# Altium PCB DB_1.PcbDoc
Units mil, origin at the board's own origin, x right, y up, seen from the top; angles counter-clockwise.
Board outline 2250 x 3000 mil, 4 copper layers (Top Layer, Signal Layer 1, Ground, Bottom Layer), stack 30.634 mil thick; 60 components, 61 nets, 348 pads, 107 vias.
Unrouted connection lines stored in the file: 50.
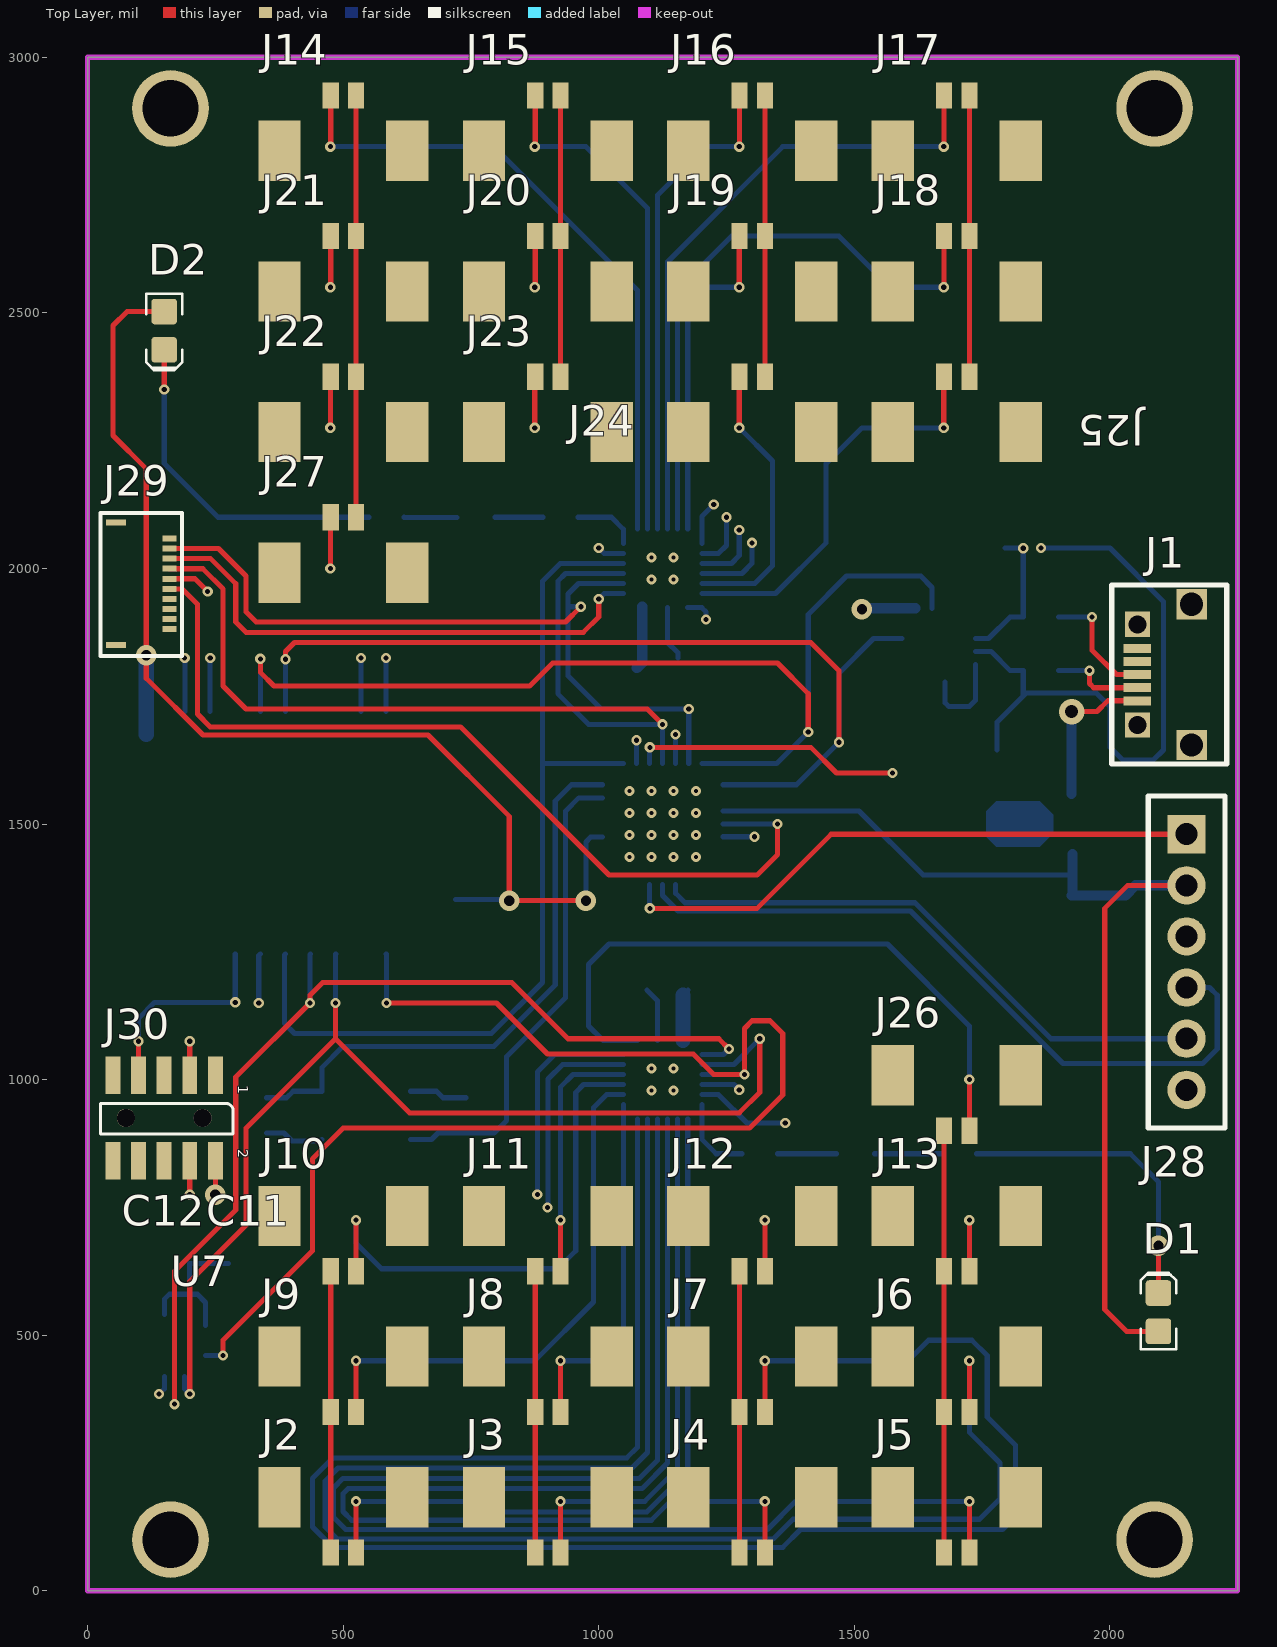
[diagram p0: Top Layer view]
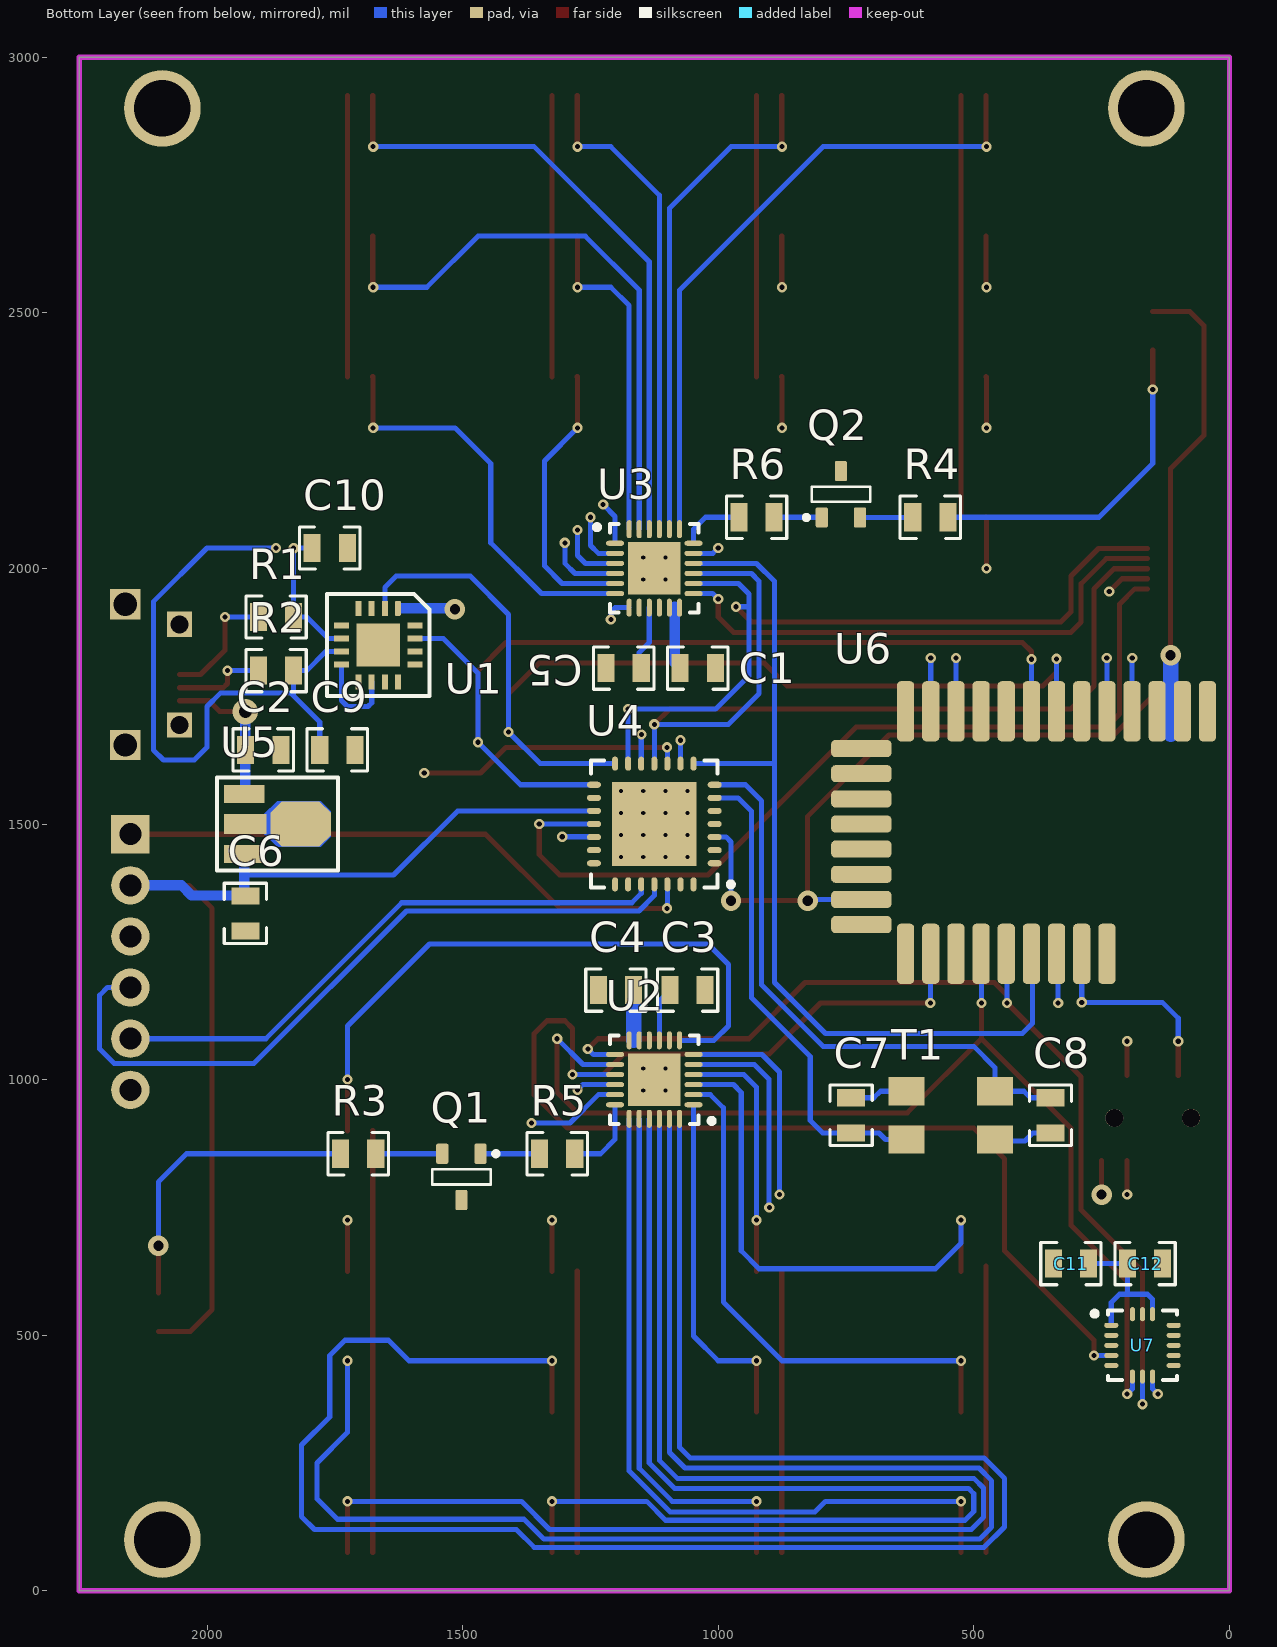
[diagram p1: Bottom Layer view, seen from below]
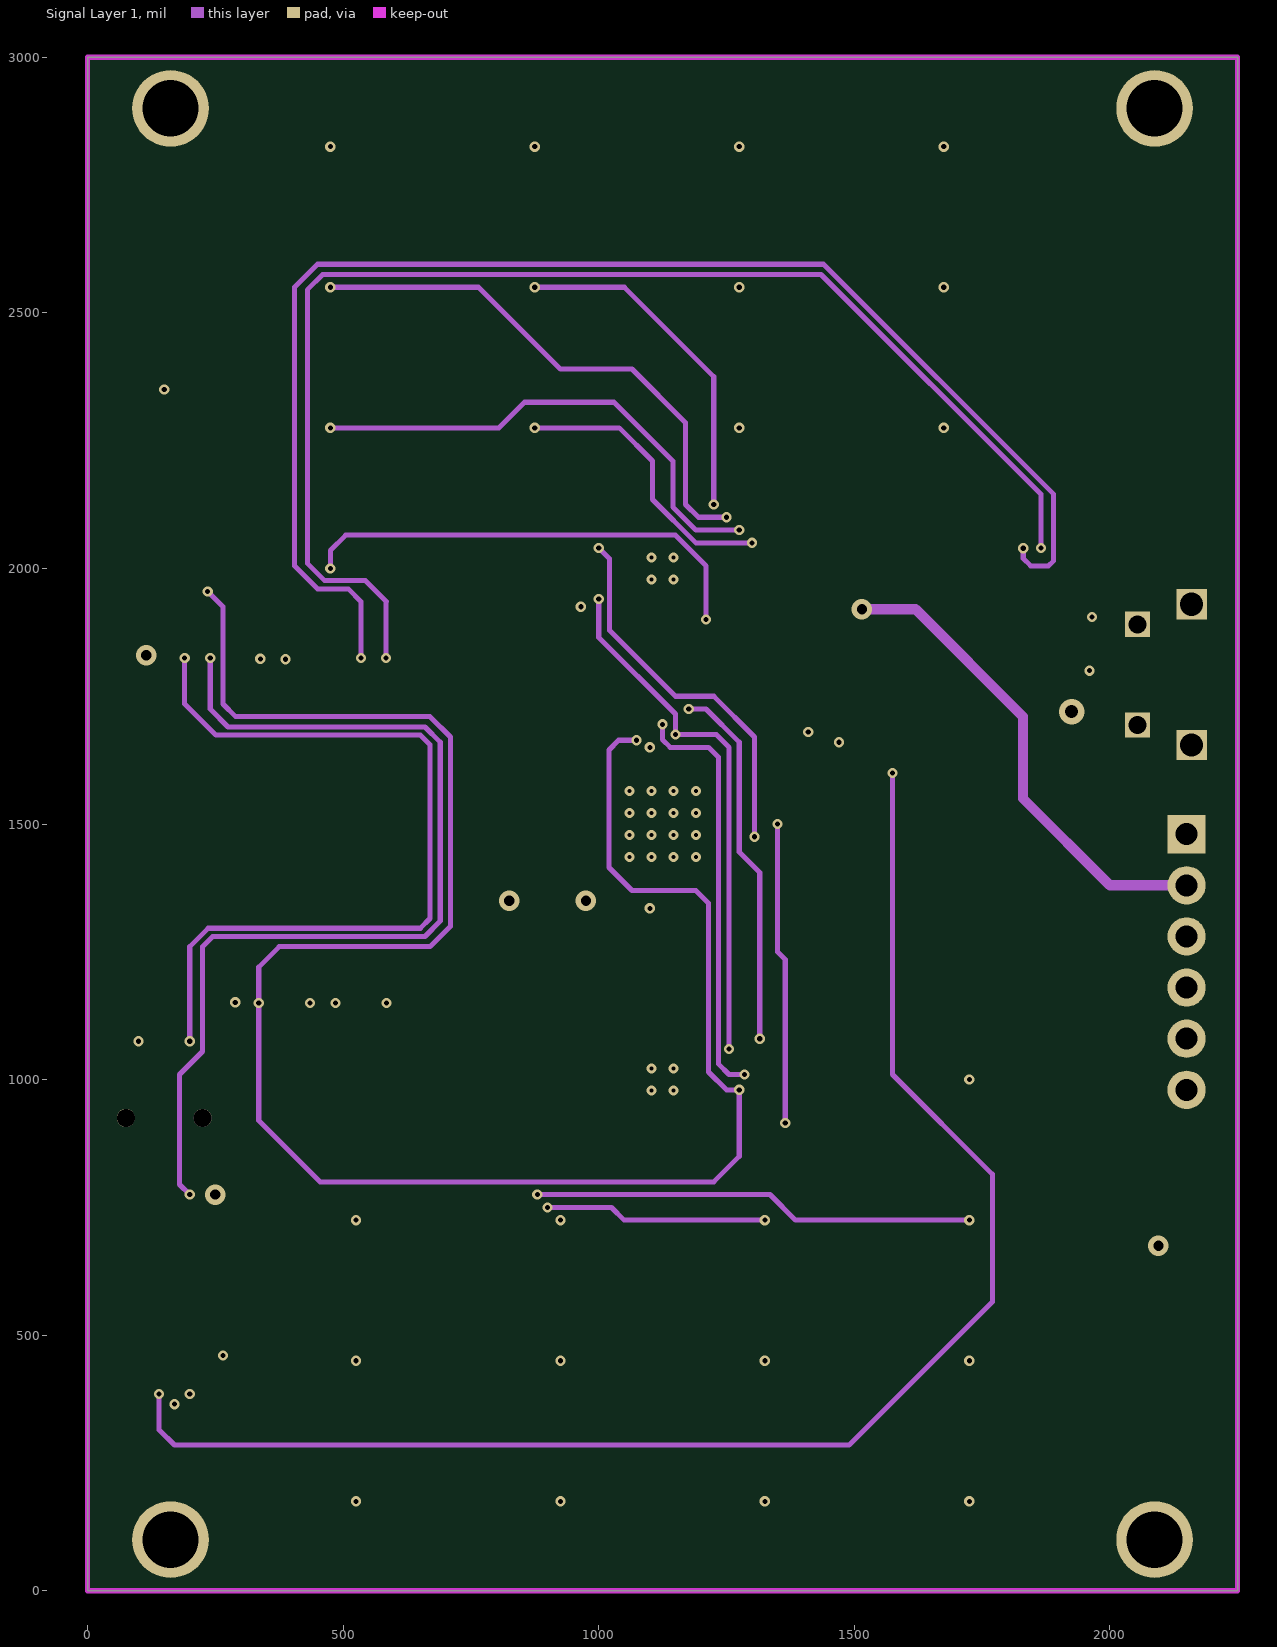
[diagram p2: Signal Layer 1]
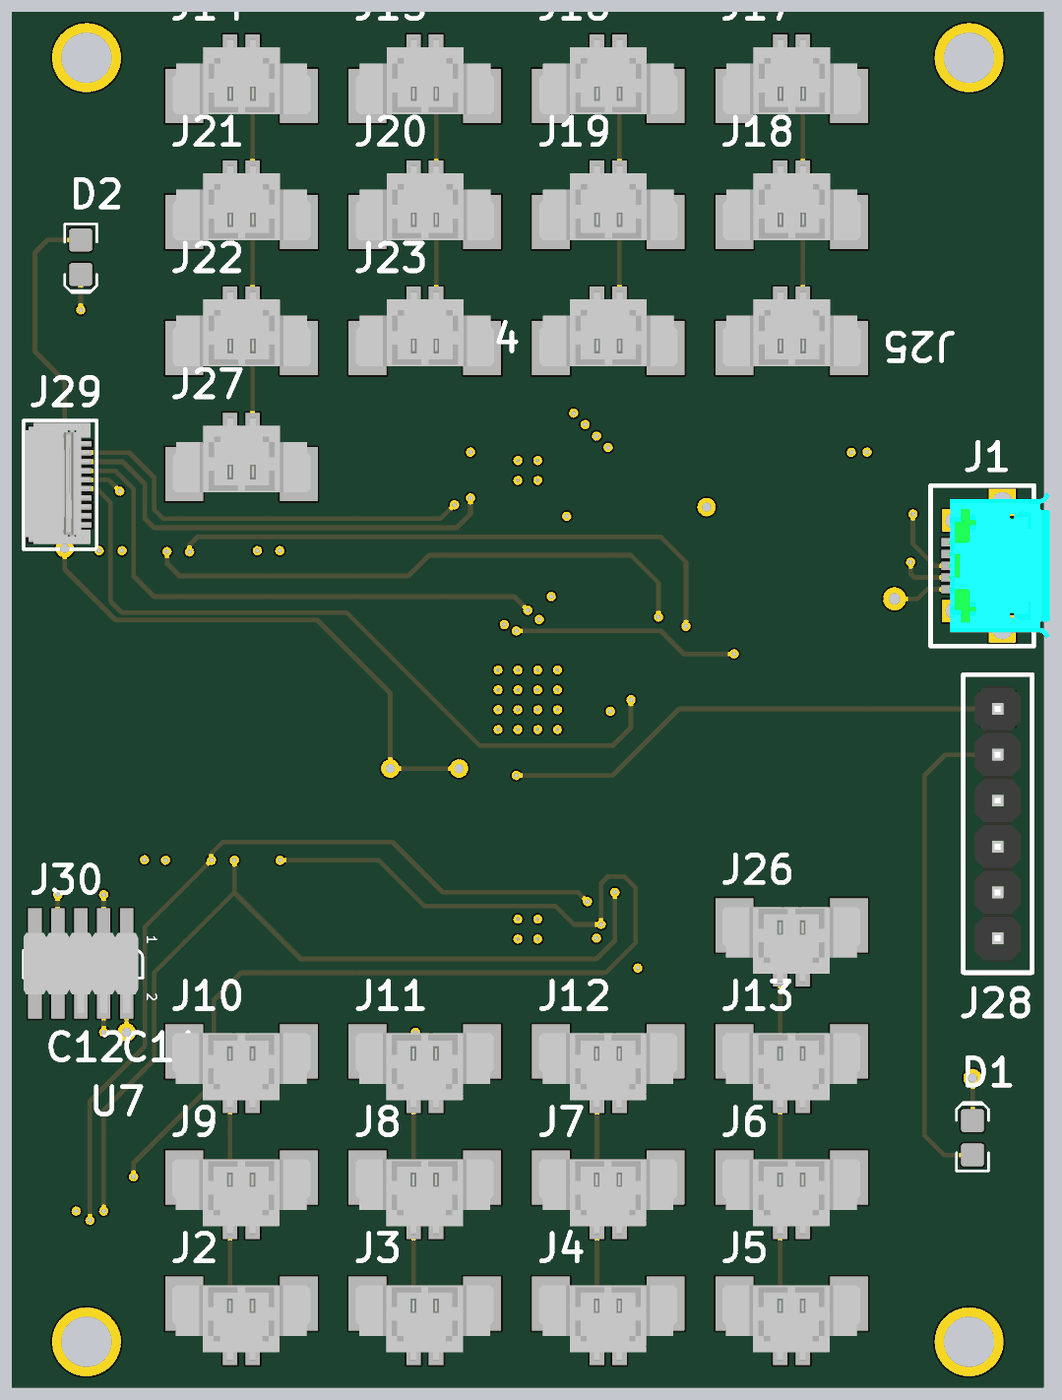
[diagram p3: 3D render of the assembled board from above, using the file's embedded part models]
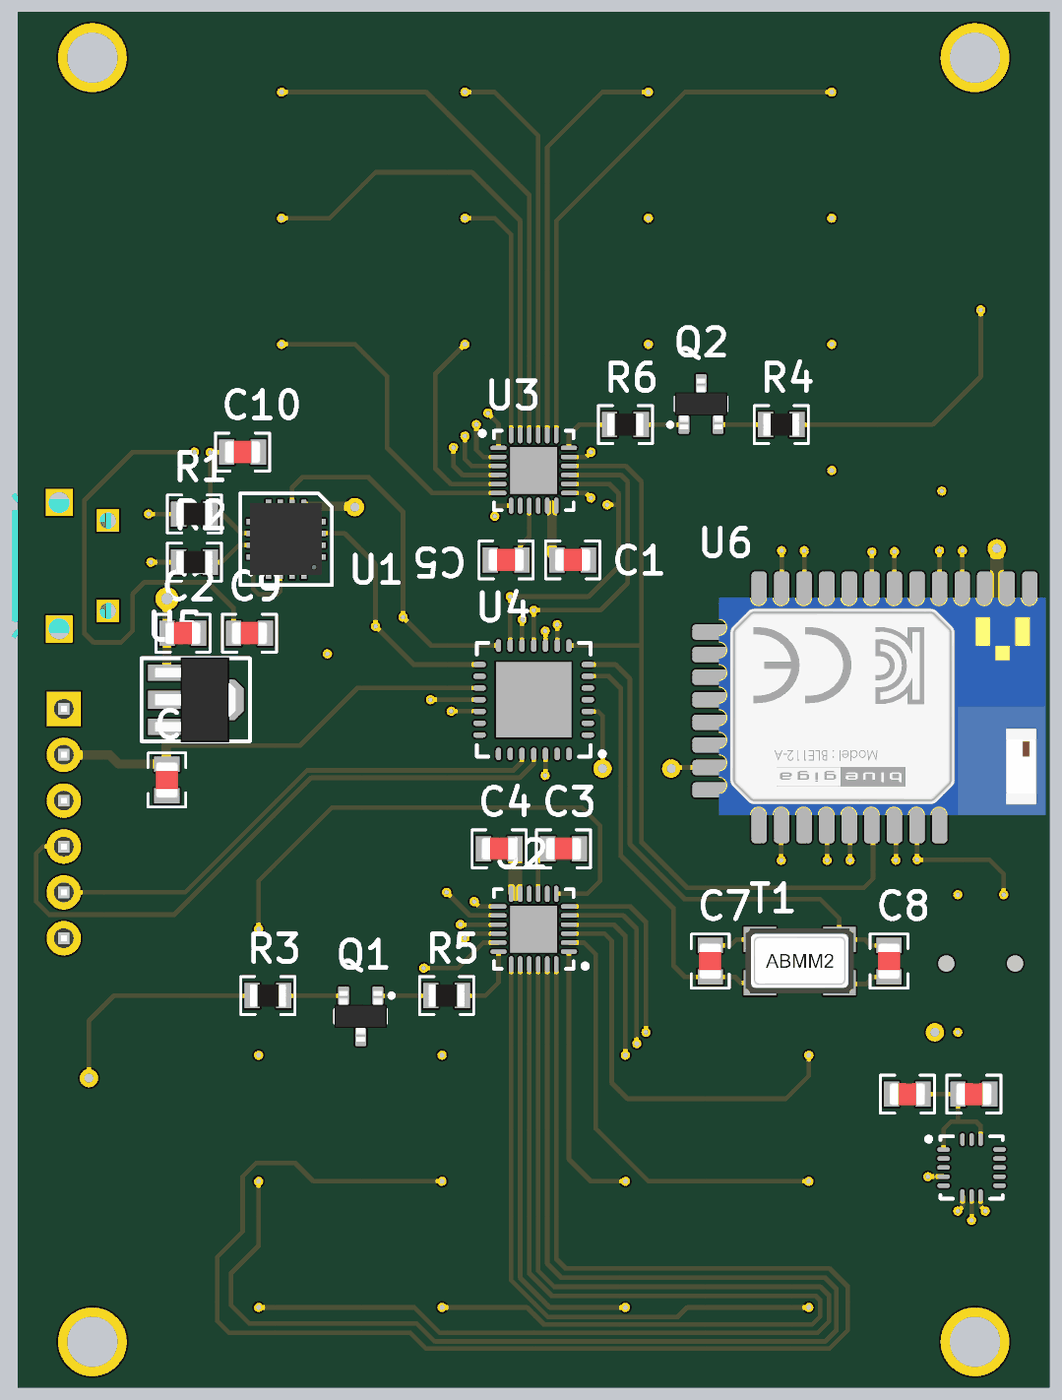
[diagram p4: 3D render of the assembled board from below, using the file's embedded part models]

## Layer stack, top to bottom
Top Solder: solder mask 0.4, Solder Resist, Dk 3.5
Top Layer: signal copper 1.4
Dielectric 1: core 10, FR-4, Dk 4.2
Signal Layer 1: signal copper 1.417
Dielectric 3: prepreg 5, Dk 4.2
Ground: signal copper 1.417
Dielectric 2: core 10, Dk 4.2
Bottom Layer: signal copper 1.4
Bottom Solder: solder mask 0.4, Solder Resist, Dk 3.5

## Board outline
0,0 2250,0 2250,3000 0,3000

## Design rules (kind name [scope] priority, off if disabled: settings)
Clearance [All] p1: gap=6
PolygonConnect [All] p1: connectstyle=Relief reliefconductorwidth=10 reliefentries=4 polygonreliefangle="90 Angle" airgapwidth=10
RoutingVias [All] p1: holewidth=28 width=50 viastyle="Through Hole" minholewidth=8 minwidth=16 maxholewidth=28 maxwidth=50
SolderMaskExpansion [All] p1: expansion=4
Width [All] p1: maxlimit=50 minlimit=6 preferedwidth=10
30 further rules are at their usual default settings.

## Components (designator, comment, footprint, x,y, rotation, side; value= is the part's Value field where it differs from the comment)
C1 "0.1µF" CAP-0805(2012)-R 1040,1805 r180 bottom
C2 "0.33µF" CAP-0805(2012)-R 1890,1645 r180 bottom
C3 "10000pF" CAP-0805(2012)-R 1060,1175 r180 bottom
C4 "0.1µF" CAP-0805(2012)-R 1200,1175 r0 bottom
C5 "10000pF" CAP-0805(2012)-R 1185,1805 r0 bottom
C6 "0.1µF" CAP-0805(2012)-R 1925,1325 r270 bottom
C7 "18pF" CAP-0805(2012)-R 740,930 r90 bottom
C8 "18pF" CAP-0805(2012)-R 350,930 r270 bottom
C9 "47pF" CAP-0805(2012)-R 1745,1645 r0 bottom
C10 "47pF" CAP-0805(2012)-R 1760,2040 r0 bottom
C11 "0.1µF" CAP-0805(2012)-R 310,640 r180 bottom
C12 "10000pF" CAP-0805(2012)-R 165,640 r0 bottom
D1 "YELLOW" LED-0805-A 2095,545 r90 top
D2 "YELLOW" LED-0805-A 150,2465 r270 top
J1 "USB" USB_CONNECTOR_5P_MICRO_USB_FCI 2053.7,1792.2 r90 top
J2 "Header 2 pin" WM7606CT-ND 525,75 r180 top
J3 "Header 2 pin" WM7606CT-ND 925,75 r180 top
J4 "Header 2 pin" WM7606CT-ND 1325,75 r180 top
J5 "Header 2 pin" WM7606CT-ND 1725,75 r180 top
J6 "Header 2 pin" WM7606CT-ND 1725,350 r180 top
J7 "Header 2 pin" WM7606CT-ND 1325,350 r180 top
J8 "Header 2 pin" WM7606CT-ND 925,350 r180 top
J9 "Header 2 pin" WM7606CT-ND 525,350 r180 top
J10 "Header 2 pin" WM7606CT-ND 525,625 r180 top
J11 "Header 2 pin" WM7606CT-ND 925,625 r180 top
J12 "Header 2 pin" WM7606CT-ND 1325,625 r180 top
J13 "Header 2 pin" WM7606CT-ND 1725,625 r180 top
J14 "Header 2 pin" WM7606CT-ND 475.79,2925 r0 top
J15 "Header 2 pin" WM7606CT-ND 875.79,2925 r0 top
J16 "Header 2 pin" WM7606CT-ND 1275.79,2925 r0 top
J17 "Header 2 pin" WM7606CT-ND 1675.79,2925 r0 top
J18 "Header 2 pin" WM7606CT-ND 1675.79,2650 r0 top
J19 "Header 2 pin" WM7606CT-ND 1275.79,2650 r0 top
J20 "Header 2 pin" WM7606CT-ND 875.79,2650 r0 top
J21 "Header 2 pin" WM7606CT-ND 475.79,2650 r0 top
J22 "Header 2 pin" WM7606CT-ND 475.79,2375 r0 top
J23 "Header 2 pin" WM7606CT-ND 875.79,2375 r0 top
J24 "Header 2 pin" WM7606CT-ND 1275.79,2375 r0 top
J25 "Header 2 pin" WM7606CT-ND 1675.79,2375 r0 top
J26 "Header 2 pin" WM7606CT-ND 1725,900 r180 top
J27 "Header 2 pin" WM7606CT-ND 475.79,2100 r0 top
J28 "Header 6 pin" HEADER-6-100MIL 2150,1480 r270 top
J29 "Header 10 pin" MOLEX-503480-1000 160,2058.43 r270 top
J30 "GRPB052VWQP-RC" GRPB052VWQP-RC 50,1008.5 r270 top
Q1 "Value" SOT23-3 1502.4,809.72 r90 bottom
Q2 "Value" SOT23-3 760,2145 r270 bottom
R1 "27" R-0805(2012)-R 1865,1905 r180 bottom
R2 "27" R-0805(2012)-R 1865,1800 r180 bottom
R3 "86.6" R-0805(2012)-R 1704.45,855 r0 bottom
R4 "86.6" R-0805(2012)-R 585,2100 r180 bottom
R5 "1k" R-0805(2012)-R 1315,855 r180 bottom
R6 "1k" R-0805(2012)-R 925,2100 r180 bottom
T1 "8MHz" CRYSTAL-8MHZ 545,930 r180 bottom
U1 "FT230XQ-R" QFN-16 1665,1850 r270 bottom
U2 "ADI-AD7147" LFCSP_WQ 1125,1000 r0 bottom
U3 "ADI-AD7147" LFCSP_WQ 1125,2000 r180 bottom
U4 "PIC18F25K80" MCHP-QFN-S-MM28_N 1125,1500 r0 bottom
U5 "L78L33ACUTR" SOT89-3 1862.01,1500 r180 bottom
U6 "BLE112-A-V1" BLE112-A-V1 720,1720.47 r270 bottom
U7 "LIS3DHTR" STM-LGA-16_N 170,480 r180 bottom

## Footprints (in the part's own frame and the unit in brackets; to place one, negate y for a bottom-side part, rotate by r counter-clockwise, add the part's x,y. Pads: shape width x height; smd on the part's side, far side on the other; paste and mask are expansions set on the pad)
BLE112-A-V1 [mm] "CLASS 2 BLTOOTH 4.0 MODULE"
  rrect50% 3x0.85 smd: 1(0,17.2) 2(0,15.95) 3(0,14.7) 4(0,13.45) 5(0,12.2) 6(0,10.95) 7(0,9.7) 8(0,8.45) 9(0,7.2) 10(0,5.95) 11(0,4.7) 12(0,3.45) 13(0,2.2) 22(12.05,2.2) 23(12.05,3.45) 24(12.05,4.7) 25(12.05,5.95) 26(12.05,7.2) 27(12.05,8.45) 28(12.05,9.7) 29(12.05,10.95) 30(12.05,12.2)
  rrect50% 0.85x3 smd: 14(1.85,0) 15(3.1,0) 16(4.35,0) 17(5.6,0) 18(6.85,0) 19(8.1,0) 20(9.35,0) 21(10.6,0)
  body extent -0.06,-0.03 11.99,18.07, height 2.3
CAP-0805(2012)-R [mm] "Capacitor 0805(2012) Reflow"
  rect 0.85x1.4 smd: 1(-0.875,0) 2(0.875,0)
  silkscreen extent -1.5,-1.05 1.5,1.05, body extent -1,-0.63 1,0.63, height 0.78
CRYSTAL-8MHZ [mm] "ABRACON ABMM2-8.000MHZ-E2-T"
  rect 1.8x1.4 smd: 1(-2.2,-1.2) 2(-2.2,1.2) 2(2.2,-1.2) 3(2.2,1.2)
  body extent -3,-1.78 3,1.82, height 1.21
GRPB052VWQP-RC [mm] "CONN HEADER .050\" 10PS DL SMD AU"
  rect 1.85x0.74 smd: 1(0,5.08) 2(4.25,5.08) 3(0,3.81) 4(4.25,3.81) 5(0,2.54) 6(4.25,2.54) 7(0,1.27) 8(4.25,1.27) 9(0,0) 10(4.25,0)
  round 0.9 hole 0.9 unplated: 21(2.121,0.635) 22(2.121,4.445)
  silkscreen extent 1.4,-0.63 2.92,5.97, body extent -0.62,-0.63 4.88,5.72, height 4.1
HEADER-6-100MIL [mil] "100 mil spacing"
  rect 75x75 hole 43: 1(0,0)
  round 75 hole 43: 2(100,0) 3(200,0) 4(300,0) 5(400,0) 6(500,0)
  silkscreen extent -75,-75 575,75, body extent -50,-50 550,50, height 339
LED-0805-A [mil]
  round 20 on Mech14: 0(0,0)
  rrect25% 50x50 smd: A(-37.5,0) K(37.5,0)
  Top Layer pour cut-out: -15,30 15,30 15,-30 -15,-30
  silkscreen extent -72,-35 77,35, body extent -39,-25 39,25, height 31
LFCSP_WQ [mm] "QFN, 24-Leads, Body 4x4mm, Pitch 0.5mm, Thermal Pad 2.5x2.5mm, IPC Medium Density"
  oval 0.9x0.25 smd: 1(-1.95,1.25) 2(-1.95,0.75) 3(-1.95,0.25) 4(-1.95,-0.25) 5(-1.95,-0.75) 6(-1.95,-1.25) 13(1.95,-1.25) 14(1.95,-0.75) 15(1.95,-0.25) 16(1.95,0.25) 17(1.95,0.75) 18(1.95,1.25)
  oval 0.25x0.9 smd: 7(-1.25,-1.95) 8(-0.75,-1.95) 9(-0.25,-1.95) 10(0.25,-1.95) 11(0.75,-1.95) 12(1.25,-1.95) 19(1.25,1.95) 20(0.75,1.95) 21(0.25,1.95) 22(-0.25,1.95) 23(-0.75,1.95) 24(-1.25,1.95)
  rect 2.6x2.6 smd: 25(0,0)
  silkscreen extent -2.97,-2.2 2.2,2.2, body extent -2.05,-2.05 2.05,2.05, height 1
MCHP-QFN-S-MM28_N [mm] "QFN, 28-Leads, Body 6x6mm, Pitch 0.65mm, Thermal Pad 4.175x4.175mm, IPC Medium Density"
  oval 0.7x0.3 smd: 1(-3,1.95) 2(-3,1.3) 3(-3,0.65) 4(-3,0) 5(-3,-0.65) 6(-3,-1.3) 7(-3,-1.95) 15(3,-1.95) 16(3,-1.3) 17(3,-0.65) 18(3,0) 19(3,0.65) 20(3,1.3) 21(3,1.95)
  oval 0.3x0.7 smd: 8(-1.95,-3) 9(-1.3,-3) 10(-0.65,-3) 11(0,-3) 12(0.65,-3) 13(1.3,-3) 14(1.95,-3) 22(1.95,3) 23(1.3,3) 24(0.65,3) 25(0,3) 26(-0.65,3) 27(-1.3,3) 28(-1.95,3)
  rect 4.18x4.18 smd: 29(0,0)
  silkscreen extent -3.92,-3.15 3.15,3.15, body extent -3,-3 3,3, height 1
MOLEX-503480-1000 [mm] "FPC Connector, 10-Leads, Right Angle, Pitch 0.5 mm, Mated Height 1.0 mm, SMT"
  rect 0.3x0.7 smd: 1(0,0) 2(0.5,0) 3(1,0) 4(1.5,0) 5(2,0) 6(2.5,0) 7(3,0) 8(3.5,0) 9(4,0) 10(4.5,0)
  rect 0.3x1 smd: MP1(-0.79,-2.65) MP2(5.29,-2.65)
  silkscreen extent -1.27,-3.43 5.84,0.64, body extent -1.14,-3.32 5.56,0.28, height 1.88
QFN-16 [mm]
  rrect50% 0.75x0.3 smd: 1(-1.825,0.975)
  rect 0.75x0.3 smd: 2(-1.825,0.325) 3(-1.825,-0.325) 4(-1.825,-0.975) 9(1.825,-0.975) 10(1.825,-0.325) 11(1.825,0.325) 12(1.825,0.975)
  rect 0.3x0.75 smd: 5(-0.975,-1.825) 6(-0.325,-1.825) 7(0.325,-1.825) 8(0.975,-1.825) 13(0.975,1.825) 14(0.325,1.825) 15(-0.325,1.825) 16(-0.975,1.825)
  rect 2.15x2.15 smd: 17(0,0)
  silkscreen extent -2.54,-2.54 2.54,2.54, body extent -2,-2 2,2, height 0.92
R-0805(2012)-R [mm] "Resistor 0805(2012) Reflow"
  rect 0.85x1.4 smd: 1(-0.875,0) 2(0.875,0)
  silkscreen extent -1.5,-1.05 1.5,1.05, body extent -1,-0.62 1,0.63, height 0.5
SOT23-3 [mm] "SOT23, 3 pin"
  round 0.5 on Mech14: 0(0,0)
  rrect25% 1x0.6 smd: 1(1.15,-0.95) 2(-1.15,0) 3(1.15,0.95)
  silkscreen extent -0.38,-1.81 1.25,1.45, body extent -1.4,-1.45 1.4,1.45, height 1.29
SOT89-3 [mm] "JEDEC TO-243 option AA / SOT89"
  round 1 on Mech14: 0(0,0)
  rrect1% 2x0.9 smd: 1(-1.65,1.5) 3(-1.65,-1.5)
  rrect1% 2.1x1 smd: 2(-1.6,0)
  oct 3x2.25 smd: 2(1.15,0)
  Top Layer region: -0.7,-0.45 -0.025,-1.125 2.15,-1.125 2.65,-0.625 2.65,0.625 2.15,1.125 -0.025,1.125 -0.7,0.45
  silkscreen extent -3,-2.3 3,2.3, body extent -2.25,-2.35 2.2,2.35, height 1.69
STM-LGA-16_N [mm] "LGA, 16-Leads, Body 3.15x3.15mm, Pitch 0.5mm, IPC Medium Density"
  oval 0.7x0.25 smd: 1(-1.55,1) 2(-1.55,0.5) 3(-1.55,0) 4(-1.55,-0.5) 5(-1.55,-1) 9(1.55,-1) 10(1.55,-0.5) 11(1.55,0) 12(1.55,0.5) 13(1.55,1)
  oval 0.25x0.7 smd: 6(-0.5,-1.55) 7(0,-1.55) 8(0.5,-1.55) 14(0.5,1.55) 15(0,1.55) 16(-0.5,1.55)
  silkscreen extent -2.5,-1.73 1.73,1.73, body extent -1.58,-1.58 1.58,1.58, height 1
USB_CONNECTOR_5P_MICRO_USB_FCI [mm] "USB_Connector_5P_MICRO_USB_FCI_TypeB"
  rect 0.45x1.35 smd: 1(-1.3,0) 2(-0.65,0) 3(0,0) 4(0.65,0) 5(1.3,0)
  rect 1.25x1.25 hole 0.9: 15(2.5,0) 16(-2.5,0)
  rect 1.5x1.5 hole 1.15: 18(-3.5,-2.7) 18(3.5,-2.7)
  silkscreen extent -4.44,-4.44 4.44,1.27, body extent -4.03,-5.33 4.02,0.25, height 2.73
WM7606CT-ND [mm]
  rect 2.1x3 smd: 0(-2.55,-2.75) 0(3.8,-2.75)
  rect 0.8x1.3 smd: 1(0,0) 2(1.25,0)
  body extent -3.19,-3.76 4.46,0.44, height 4.72

## Part data
C1 C2 C3 C4 C5 C6 C7 C8 C9 C10 C11 C12: library part C-0805(2012), "___ OHM ___ mW 0805(2012) SMD"
D1 D2: library part LED_0805_YELLOW, "LED, 0805 SMD, YELLOW"
J1: "USB_Connector_5P_MICRO_USB_FCI"
J2 J3 J4 J5 J6 J7 J8 J9 J10 J11 J12 J13 J14 J15 J16 J17 J18 J19 J20 J21 J22 J23 J24 J25 J26 J27: library part CON-2Pin, "Header, 2 pin, .1 pitch"
J28: library part CON-6Pin-100Mil, "Header, 6 pin, .1 pitch"
J29: library part WM1389CT-ND, "Header, 10 pin, .50mm pitch"
J30: "CONN HEADER .050\" 10PS DL SMD AU"
Q1 Q2: library part FMMT591CT-ND, "Transistor PNP"
R1 R2 R3 R4 R5 R6: library part R-0805(2012), "___ OHM ___ mW 0805(2012) SMD"
T1: library part CRYSTAL_8MHz, "Oscillator Crystal 8MHz 10ppm"
U1: "USB to Basic UART Interface Chip, UHCI/OHCI/EHCI Compatible, USB 2.0 Compatible, -40 to +85 degC, 16-Pin QFN, Pb-Free, Tape and Reel"
U6: "CLASS 2 BLTOOTH 4.0 MODULE"
U7: library part CMP-0234-00055-3, "MEMS Digital Output Motion Sensor Ultra Low-Power High Performance 3-Axes \"nano\" Accelerometer, 1.71 to 3.6 V, -40 to 85 degC, 16-pin (LGA-16), Pb-Free, Tape and Reel"

## Free pads (board coordinates)
  round 150 hole 110: 0(162.5,100) 0(162.5,2900) 0(2087.5,100) 0(2087.5,2900)

## Via types
v1: diameter 20, hole 10, Top Layer to Bottom Layer, 76 vias
v2: diameter 19.68, hole 7.87, Top Layer to Bottom Layer, 24 vias
v3: diameter 40, hole 20, Top Layer to Bottom Layer, 6 vias
v4: diameter 50, hole 25, Top Layer to Bottom Layer, 1 vias

## Nets (pads, with @x,y where several pads share a name; then routed paths per layer and width w, separated by ;. In a path a pad name is that pad's centre, name@x,y a point inside that pad or via, vN(x,y) a via of type N, cw(c..) or ccw(c..) an arc to the next point about the centre after c; other vN are vias at no path point)
3.3V: C1.1 C4.1 C6.1 C11.2 C12.2 D1.A D2.A J28.2 J29.1 J30.2 U1.1 U1.8 U1.10 U2.11 U2.12 U3.11 U3.12 U4.3 U4.17 U5.3 U6.2 U6.3 U6.20 U7.1 U7.14 | length 6341.4
  Top Layer w10: D2.A 77.5,2502.5 50,2475 50,2260 115,2195 v3(115,1830) 115,1785 226,1674 666,1674 825,1515 v3(825,1350) v3(975,1350) ; v3(250,775) J30.2 ; D1.A 2032.5,507.5 1990,550 1990,1335 2035,1380 J28.2
  Signal Layer 1 w20: v3(1515,1920) 1620,1920 1830,1710 1830,1550 2000,1380 J28.2
  Bottom Layer w10: U7.14 150.31,570.31 160,580 215,580 231.02,563.98 U7.1 ; 199.45,580 C12.2 C11.2 ; U6.20 822.64,1352.36 v3(825,1350) ; v3(975,1350) 975,1465 984.41,1474.41 U4.3 ; C4.1@1165,1165 C4.1@1175,1175 ; U4.17 1509.41,1525.59 1635,1400 1926.97,1400 ; U1.10 1677.8,1737.2 1685,1730 1725,1730 1736.85,1741.85 U1.8
  Bottom Layer w20: C1.1 1085,1815.55 1085,1925 ; v3(1515,1920) 1516.85,1921.85 1620,1921.85 ; C6.1@1925,1360 2030,1360 2050,1380 J28.2 ; C6.1@1926.97,1361.97 U5.3
  Bottom Layer w30: 115,1675 v3(115,1830) ; 1165,1076.77 C4.1@1165,1165
CLK_IN: C7.1 T1.1 U4.6 | length 939.2
  Bottom Layer w10: T1.1 672.76,882.76 685.55,895.55 C7.1 795.55,895.55 820,920 820,1045 935,1160 935,1525 961.18,1551.18 U4.6
CLK_OUT: C8.1 T1.3 U4.7 | length 1148.4
  Bottom Layer w10: C8.1 389.45,964.45 402.24,977.24 T1.3 458.39,1023.39 500,1065 795,1065 915,1185 915,1545 946.77,1576.77 U4.7
CS1: J29.5 U2.16 U4.9 U6.28 | length 4148.7
  Top Layer w10: J29.5 210.32,1979.68 v1(235,1955)
  Signal Layer 1 w10: v1(235,1955) 265,1925 265,1735 290,1710 670,1710 710,1670 710,1300 670,1260 375,1260 335,1220 v1(335,1150) 335,920 455,800 1225,800 1275,850 v1(1275,980) 1250,980 1215,1015 1215,1345 1190,1370 1065,1370 1020,1415 1020,1645 1038.82,1663.82 v1(1073.82,1663.82)
  Bottom Layer w10: v1(335,1150) 335,1242.95 U6.28 ; U4.9 v1(1073.82,1663.82) ; U2.16 1264.84,990.16 v1(1275,980)
CS2: U3.16 U4.8 U6.27 | length 1807.6
  Bottom Layer w10: U6.27 385,1243.74 385,1150 385,1110 405,1090 790,1090 890,1190 890,1618.11 ; U4.8 890,1618.11 ; U3.16 924.84,2009.84 890,1975 890,1618.11
CS3: U4.10 U7.8 | length 3510.3
  Top Layer w10: v1(1100,1650) 1415,1650 1465,1600 v1(1575,1600)
  Signal Layer 1 w10: v1(140,385) 140,315 170,285 1490,285 1770,565 1770,815 1575,1010 v1(1575,1600)
  Bottom Layer w10: v1(140,385) 150.31,395.31 U7.8 ; U4.10 1099.41,1649.41 v1(1100,1650)
GND: C1.2 C2.2 C3.2 C4.2 C5.2 C6.2 C7.2 C8.2 C9.1 C10.1 C11.1 C12.1 J1.5 J2.2 J3.2 J4.2 J5.2 J6.2 J7.2 J8.2 J9.2 J10.2 J11.2 J12.2 J13.2 J14.2 J15.2 J16.2 J17.2 J18.2 J19.2 J20.2 J21.2 J22.2 J23.2 J24.2 J25.2 J26.2 J27.2 J28.3 J29.10 J30.1 Q1.2 Q2.2 T1.2 U1.3 U1.13 U1.17 U2.10 U2.25 U3.10 U3.25 U4.5 U4.16 U4.29 U5.2 U6.1 U6.10 U6.21 U6.30 U7.5 U7.10 U7.12 | length 5189.7
  Top Layer w10: J2.2 J9.2 J10.2@475.79,635 ; J27.2 J22.2 J21.2 J14.2 ; J3.2 J8.2 J11.2 ; J23.2 J20.2 J15.2 ; J4.2 J7.2 J12.2 ; J24.2 J19.2 J16.2 ; J5.2 J6.2 J13.2 J26.2 ; J25.2 J18.2 J17.2
  Bottom Layer w10: C8.2 384.45,895.55 400,880 455.63,880 T1.2@458.39,882.76 ; T1.2@631.61,977.24 682.76,977.24 695.55,964.45 C7.2
  other v2: 1103.35,978.35 1146.65,978.35 1103.35,1021.65 1146.65,1021.65 1060.04,1435.04 1103.35,1435.04 1146.65,1435.04 1189.96,1435.04 1060.04,1478.35 1103.35,1478.35 1146.65,1478.35 1189.96,1478.35 1060.04,1521.65 1103.35,1521.65 1146.65,1521.65 1189.96,1521.65 1060.04,1564.96 1103.35,1564.96 1146.65,1564.96 1189.96,1564.96 1103.35,1978.35 1146.65,1978.35 1103.35,2021.65 1146.65,2021.65
ICSPCLK: J28.5 U4.24 | length 1134.7
  Bottom Layer w10: U4.24 1150.59,1364.41 1169,1346 1619,1346 1885,1080 J28.5
ICSPDAT: J28.4 U4.25 | length 1426
  Bottom Layer w10: U4.25 1125,1360 1155,1330 1610,1330 1908.5,1031.5 2181.5,1031.5 2210,1060 2210,1165 2195,1180 J28.4
INT_1: J29.6 U2.17 U4.18 | length 2508.8
  Top Layer w10: J29.6 185,1960 215,1930 215,1715 240,1690 730,1690 1020,1400 1310,1400 1350,1440 v1(1350,1500)
  Signal Layer 1 w10: v1(1350,1500) 1350,1250 1365,1235 v1(1365,915)
  Bottom Layer w10: U2.17 1234.53,970.47 1290,915 v1(1365,915) ; U4.18 v1(1350,1500)
INT_2: U3.17 U4.19 | length 850
  Signal Layer 1 w10: v1(1000,2040) 1021,2019 1021,1879 1150,1750 1225,1750 1305,1670 v1(1305,1475)
  Bottom Layer w10: v1(1000,2040) 1010.47,2029.53 U3.17 ; U4.19 1243.7,1475 v1(1305,1475)
MCLR: J28.1 U4.26 | length 1157.2
  Top Layer w10: v1(1100,1335) 1310,1335 1455,1480 J28.1
  Bottom Layer w10: U4.26 1099.41,1335.59 v1(1100,1335)
MISO: J29.3 U2.13 U3.13 U4.12 U6.26 U7.7 | length 4135.7
  Top Layer w10: J29.3 240.94,2019.06 290,1970 290,1895 310,1875 970,1875 1000,1905 v1(1000,1940) ; v1(170,365) 170,625 290,745 290,1005 v1(435,1150) 435,1165 460,1190 830,1190 940,1080 1235,1080 v1(1255,1060)
  Signal Layer 1 w10: v1(1000,1940) 1000,1865 1150,1715 v1(1150,1675) 1230,1675 1255,1650 v1(1255,1060)
  Bottom Layer w10: v1(170,365) U7.7 ; v1(435,1150) 435,1244.53 U6.26 ; v1(1000,1940) 1010.79,1950.79 U3.13 ; v1(1150,1675) 1150.59,1674.41 U4.12 ; U2.13 1244.21,1049.21 v1(1255,1060)
MOSI: J29.2 U2.14 U3.14 U4.13 U6.25 U7.6 | length 4475.4
  Top Layer w10: J29.2 256.26,2038.74 310,1985 310,1915 330,1895 935,1895 v1(965,1925) ; v1(200,385) 200,605 310,715 310,905 485,1080 ; v1(485,1150) 485,1080 ; v1(1315,1080) 1315,975 1275,935 630,935 485,1080
  Signal Layer 1 w10: v1(1176.18,1725) 1210,1725 1275,1660 1275,1445 1315,1405 v1(1315,1080)
  Bottom Layer w10: U7.6 189.68,395.32 v1(200,385) ; v1(485,1150) 485,1245.32 U6.25 ; v1(965,1925) 940,1925 ; U3.14 960.47,1970.47 940,1950 940,1925 ; U4.13 v1(1176.18,1725) 1005,1725 940,1790 940,1925 ; U2.14 1264.53,1029.53 v1(1315,1080)
NetC3_1: C3.1 U2.9 | length 106.8
  Bottom Layer w10: C3.1 1115,1154.45 1115,1076.93 U2.9
NetC5_1: C5.1 U3.9 | length 107.1
  Bottom Layer w10: U3.9 1134.84,1855.16 1155,1835 C5.1@1155,1824.45
NetD1_K: D1.K R3.2 | length 596.4
  Top Layer w10: D1.K v3(2095,675)
  Bottom Layer w10: R3.2 2040,855 2095,800 v3(2095,675)
NetD2_K: D2.K R4.2 | length 666.5
  Top Layer w10: v1(150,2350) D2.K
  Bottom Layer w10: v1(150,2350) 150,2205 255,2100 R4.2
NetJ1_2: J1.2 R2.1 | length 182.7
  Top Layer w10: v1(1960,1800) 1960,1775 1968.39,1766.61 J1.2
  Bottom Layer w10: R2.1 v1(1960,1800)
NetJ1_3: J1.3 R1.1 | length 239
  Top Layer w10: v1(1965,1905) 1965,1840 2012.8,1792.2 J1.3
  Bottom Layer w10: R1.1 v1(1965,1905)
NetQ1_1: Q1.1 R5.1 | length 115.6
  Bottom Layer w10: R5.1 Q1.1
NetQ1_3: Q1.3 R3.1 | length 130.2
  Bottom Layer w10: Q1.3 R3.1
NetQ2_1: Q2.1 R6.2 | length 93.3
  Bottom Layer w10: Q2.1 797.68,2100 R6.2
NetQ2_3: Q2.3 R4.1 | length 103.3
  Bottom Layer w10: R4.1 619.72,2099.72 Q2.3
NetR5_2: R5.2 U2.18 | length 158
  Bottom Layer w10: U2.18 1201.77,883.23 1230,855 R5.2
NetR6_1: R6.1 U3.18 | length 126
  Bottom Layer w10: R6.1 1025,2100 1048.23,2076.77 U3.18
P2_1: J30.4 U6.5 | length 2095.4
  Top Layer w10: v1(200,775) J30.4
  Signal Layer 1 w10: v1(200,775) 180,795 180,1010 225,1055 225,1260 245,1280 660,1280 690,1310 690,1660 660,1690 275,1690 240,1725 v1(240,1825)
  Bottom Layer w10: U6.5 239.68,1824.68 v1(240,1825)
P2_2: J30.3 U6.4 | length 1792.1
  Top Layer w10: J30.3 v1(200,1075)
  Signal Layer 1 w10: v1(190,1825) 190,1735 251,1674 651,1674 670,1655 670,1315 651,1296 236,1296 200,1260 v1(200,1075)
  Bottom Layer w10: v1(190,1825) 190.47,1824.53 U6.4
RESET: J30.7 U6.29 | length 408.2
  Top Layer w10: J30.7 v1(100,1075)
  Bottom Layer w10: v1(100,1075) 100,1120 131.1,1151.1 v1(288.9,1151.1) U6.29
RX: U1.15 U4.15 U6.8 | length 1917.2
  Top Layer w10: v1(387.32,1822.32) 387.32,1837.32 405,1855 1415,1855 1470,1800 v1(1470,1660)
  Bottom Layer w10: U6.8 v1(387.32,1822.32) ; U4.15 1386.77,1576.77 v1(1470,1660) 1470,1795 1537.8,1862.8 U1.15
S1: J2.1 U2.19 | length 1480.2
  Top Layer w10: J2.1 v1(525,175)
  Bottom Layer w10: v1(525,175) 790,175 811,154 1094,154 1174.21,234.21 U2.19
S2: J3.1 U2.20 | length 1040
  Top Layer w10: J3.1 v1(925,175)
  Bottom Layer w10: v1(925,175) 1090,175 1154.53,239.53 U2.20
S3: J4.1 U2.21 | length 2315.4
  Top Layer w10: J4.1 v1(1325,175)
  Bottom Layer w10: U2.21 1134.84,249.84 1085,200 510,200 500,190 500,155 517,138 1103,138 1140,175 v1(1325,175)
S4: J5.1 U2.22 | length 2758.4
  Top Layer w10: J5.1 v1(1725,175)
  Bottom Layer w10: U2.22 1115.16,255.16 1080,220 500,220 481,201 481,144 505,120 1330,120 1385,175 v1(1725,175)
S5: J6.1 U2.23 | length 3153.7
  Top Layer w10: J6.1 v1(1725,450)
  Bottom Layer w10: U2.23 1095.47,270.47 1065,240 490,240 465,215 465,125 489,101 1341,101 1380,140 1745,140 1785,180 1785,250 1725,310 v1(1725,450)
S6: J7.1 U2.24 | length 3716.6
  Top Layer w10: J7.1 v1(1325,450)
  Bottom Layer w10: U2.24 1075.79,280.79 1055,260 480,260 440,220 440,125 480,85 1360,85 1395,120 1790,120 1815,145 1815,285 1760,340 1760,460 1730,490 1645,490 1605,450 v1(1325,450)
S7: J8.1 U2.1 | length 695.8
  Top Layer w10: J8.1 v1(925,450)
  Bottom Layer w10: v1(925,450) 1000,450 1048.23,498.23 U2.1
S8: J9.1 U2.2 | length 1061.4
  Top Layer w10: J9.1 v1(525,450)
  Bottom Layer w10: v1(525,450) 875,450 990,565 990,945 1015.47,970.47 U2.2
S9: J10.1 U2.3 | length 1019.7
  Top Layer w10: J10.1 v1(525,725)
  Bottom Layer w10: v1(525,725) 525,680 575,630 920,630 955,665 955,975 970.16,990.16 U2.3
S10: J11.1 U2.4 | length 493.5
  Top Layer w10: J11.1 v1(925,725)
  Bottom Layer w10: v1(925,725) 925,985 949.84,1009.84 U2.4
S11: J12.1 U2.5 | length 945.8
  Top Layer w10: J12.1 v1(1325,725)
  Signal Layer 1 w10: v1(900,750) 1025,750 1050,725 v1(1325,725)
  Bottom Layer w10: v1(900,750) 901,751 901,1001 929.53,1029.53 U2.5
S12: J13.1 U2.6 | length 1388.1
  Top Layer w10: J13.1 v1(1725,725)
  Signal Layer 1 w10: v1(880,775) 1335,775 1385,725 v1(1725,725)
  Bottom Layer w10: v1(880,775) 880,1015 914.21,1049.21 U2.6
S13: J14.1 U3.19 | length 1284.9
  Top Layer w10: v1(475,2825) 475.79,2825.79 J14.1
  Bottom Layer w10: v1(475,2825) 795,2825 1075.79,2544.21 U3.19
S14: J15.1 U3.20 | length 998.5
  Top Layer w10: v1(875,2825) 875.79,2825.79 J15.1
  Bottom Layer w10: v1(875,2825) 975,2825 1095.47,2704.53 U3.20
S15: J16.1 U3.21 | length 952.8
  Top Layer w10: v1(1275,2825) 1275.79,2825.79 J16.1
  Bottom Layer w10: U3.21 1115.16,2730.16 1210,2825 v1(1275,2825)
S16: J17.1 U3.22 | length 1256.6
  Top Layer w10: v1(1675,2825) 1675.79,2825.79 J17.1
  Bottom Layer w10: U3.22 1134.84,2600.38 ; 1135.38,2600.38 1360,2825 v1(1675,2825)
S17: J18.1 U3.23 | length 1173.7
  Top Layer w10: v1(1675,2550) 1675.79,2550.79 J18.1
  Bottom Layer w10: U3.23 1154.53,2544.53 1260,2650 1470,2650 1570,2550 v1(1675,2550)
S18: J19.1 U3.24 | length 653.4
  Top Layer w10: v1(1275,2550) 1275,2649.21 J19.1
  Bottom Layer w10: U3.24 1174.21,2514.21 1210,2550 v1(1275,2550)
S19: J20.1 U3.1 | length 858.2
  Top Layer w10: v1(875,2550) 875.79,2550.79 J20.1
  Signal Layer 1 w10: v1(875,2550) 1050,2550 1225,2375 v1(1225,2125)
  Bottom Layer w10: U3.1 1201.77,2101.77 v1(1225,2125)
S20: J21.1 U3.2 | length 1265.1
  Top Layer w10: v1(475,2550) 475.79,2550.79 J21.1
  Signal Layer 1 w10: v1(475,2550) 765,2550 925,2390 1065,2390 1170,2285 1170,2125 1195,2100 v1(1250,2100)
  Bottom Layer w10: U3.2 1234.53,2029.53 1250,2045 v1(1250,2100)
S21: J22.1 U3.3 | length 1206.8
  Top Layer w10: v1(475,2275) 475,2374.21 J22.1
  Signal Layer 1 w10: v1(475,2275) 805,2275 855,2325 1030,2325 1145,2210 1145,2120 1190,2075 v1(1275,2075)
  Bottom Layer w10: U3.3 1259.84,2009.84 1275,2025 v1(1275,2075)
S22: J23.1 U3.4 | length 808.9
  Top Layer w10: v1(875,2275) 875,2374.21 J23.1
  Signal Layer 1 w10: v1(875,2275) 1040,2275 1105,2210 1105,2135 1190,2050 v1(1300,2050)
  Bottom Layer w10: U3.4 1280.16,1990.16 1300,2010 v1(1300,2050)
S23: J24.1 U3.5 | length 549.8
  Top Layer w10: v1(1275,2275) 1275,2374.21 J24.1
  Bottom Layer w10: U3.5 1305.47,1970.47 1340,2005 1340,2210 v1(1275,2275)
S24: J25.1 U3.6 | length 798.6
  Top Layer w10: v1(1675,2275) 1675,2374.21 J25.1
  Bottom Layer w10: U3.6 1345.79,1950.79 1445,2050 1445,2205 1515,2275 v1(1675,2275)
S25: J26.1 U2.7 | length 1260.3
  Top Layer w10: J26.1 v1(1725,1000)
  Bottom Layer w10: U2.7 1008.23,1076.77 980,1105 980,1225 1020,1265 1565,1265 1725,1105 v1(1725,1000)
S26: J27.1 U3.7 | length 1066.8
  Top Layer w10: v1(475,2000) 475,2099.21 J27.1
  Signal Layer 1 w10: v1(475,2000) 475,2035 505,2065 1150,2065 1210,2005 v1(1210,1900)
  Bottom Layer w10: U3.7 1201.77,1923.23 1210,1915 v1(1210,1900)
SCLK: J29.4 U2.15 U3.15 U4.11 U6.23 U7.4 | length 5379
  Top Layer w10: J29.4 225.63,1999.37 265,1960 265,1770 310,1725 1095,1725 v1(1125,1695) ; v1(265,460) 265,490 440,665 440,845 500,905 1295,905 1360,970 1360,1090 1335,1115 1300,1115 1285,1100 v1(1285,1010) 1225,1010 1185,1050 900,1050 800,1150 v1(585,1150)
  Signal Layer 1 w10: v1(1125,1695) 1125,1665 1140,1650 1215,1650 1234,1631 1234,1031 1255,1010 v1(1285,1010)
  Bottom Layer w10: U7.4 264.69,460.31 v1(265,460) ; U6.23 585,1245.24 v1(585,1150) ; 970,1990 935,1990 920,1975 920,1755 980,1695 v1(1125,1695) U4.11 ; 970,1990.16 U3.15 ; U2.15 1284.84,1009.84 v1(1285,1010)
TX: U1.2 U4.14 U6.7 | length 2117.7
  Top Layer w10: v1(338.11,1823.11) 338.11,1796.89 365,1770 865,1770 910,1815 1350,1815 1410,1755 v1(1410,1680)
  Bottom Layer w10: U6.7 v1(338.11,1823.11) ; U4.14 1348.11,1618.11 v1(1410,1680) 1410,1910 1485,1985 1630,1985 1652.2,1962.8 U1.2
USB_D+: C10.2 R1.2 U1.6 U6.11 | length 3110.2
  Signal Layer 1 w10: v1(535,1825) 535,1935 510,1960 450,1960 405,2005 405,2550 450,2595 1440,2595 1890,2145 1890,2015 1880,2005 1845,2005 1830.55,2019.45 v1(1830.55,2039.45)
  Bottom Layer w10: U6.11 v1(535,1825) ; v1(535,1825) v1(535,1825) ; U1.6 1762.8,1862.8 1805,1905 R1.2 v1(1830.55,2039.45) 1830,2040 C10.2
USB_D-: C9.2 R2.2 U1.7 U6.12 | length 3911.4
  Signal Layer 1 w10: v1(584.17,1825) 584.17,1934.17 585,1935 544,1976 464,1976 430,2010 430,2545 460,2575 1435,2575 1865,2145 v1(1865,2040)
  Bottom Layer w10: U6.12 v1(584.17,1825) ; U1.7 1767.8,1837.2 1805,1800 R2.2 1830.55,1750.55 ; C9.2 1779.45,1699.45 1830.55,1750.55 ; v1(1865,2040) 2000,2040 2105,1935 2105,1645 2085,1625 2025,1625 2000,1650 2000,1730 1974,1756 1836,1756 1830.55,1750.55
V_USB: C2.1 J1.1 U5.1 | length 298.4
  Top Layer w10: v4(1925,1720) 1975,1720 1996.02,1741.02 J1.1
  Bottom Layer w20: U5.1@1925,1559.06 v4(1925,1720)
pads on no net: D1.0 D2.0 J1.4 J1.15 J1.16 J1.18 J2.0 J3.0 J4.0 J5.0 J6.0 J7.0 J8.0 J9.0 J10.0 J11.0 J12.0 J13.0 J14.0 J15.0 J16.0 J17.0 J18.0 J19.0 J20.0 J21.0 J22.0 J23.0 J24.0 J25.0 J26.0 J27.0 J28.6 J29.7 J29.8 J29.9 J29.MP1 J29.MP2 J30.5 J30.6 J30.8 J30.9 J30.10 J30.21 J30.22 Q1.0 Q2.0 U1.4 U1.5 U1.9 U1.11 U1.12 U1.14 U1.16 U2.8 U3.8 U4.1 U4.2 U4.4 U4.20 U4.21 U4.22 U4.23 U4.27 U4.28 U5.0 U6.6 U6.9 U6.13 U6.14 U6.15 U6.16 U6.17 U6.18 U6.19 U6.22 U6.24 U7.2 U7.3 U7.9 U7.11 U7.13 U7.15 U7.16

## Keep-outs
Keep-Out Layer:
  the board outline again, w10

## Silkscreen, mask and mechanical layers (free items; w line width, h text height)
Mechanical 3:
  the board outline again, w10

## Text inside footprints (layer, text, board x,y; h text height)
J30: Top Overlay "1" at 295,988.5 h20 r270; Top Overlay "2" at 295,863.5 h20 r270